# EAGLE board driverMotor (EAGLE 9.6.2)
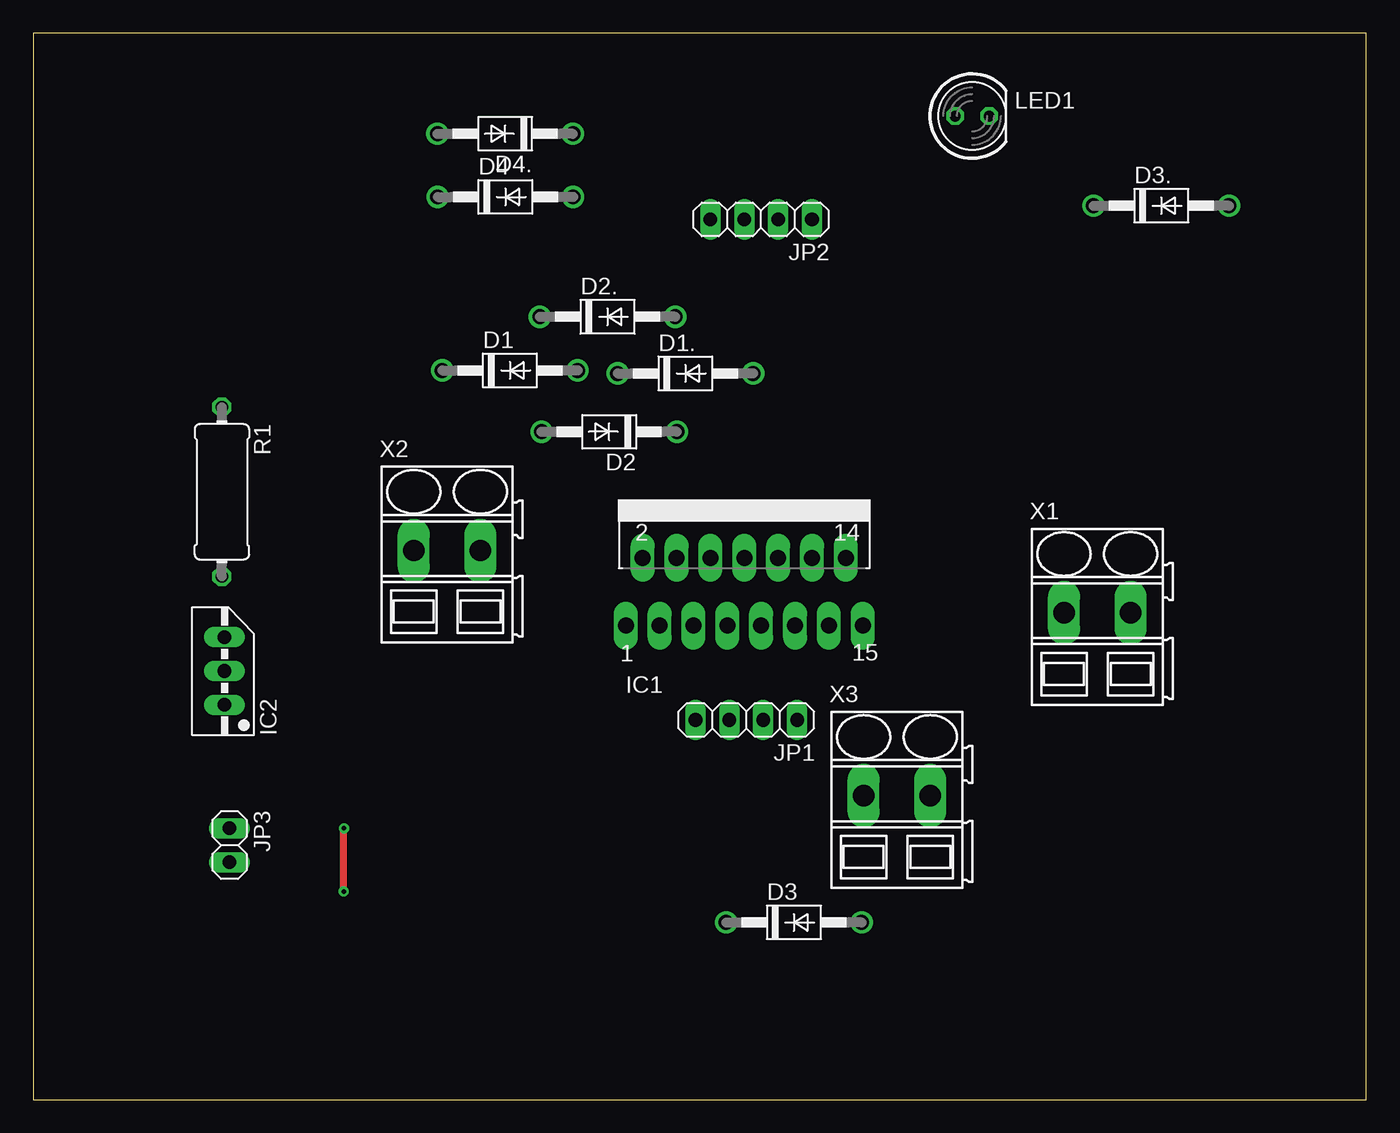
[diagram p0: board, top side]
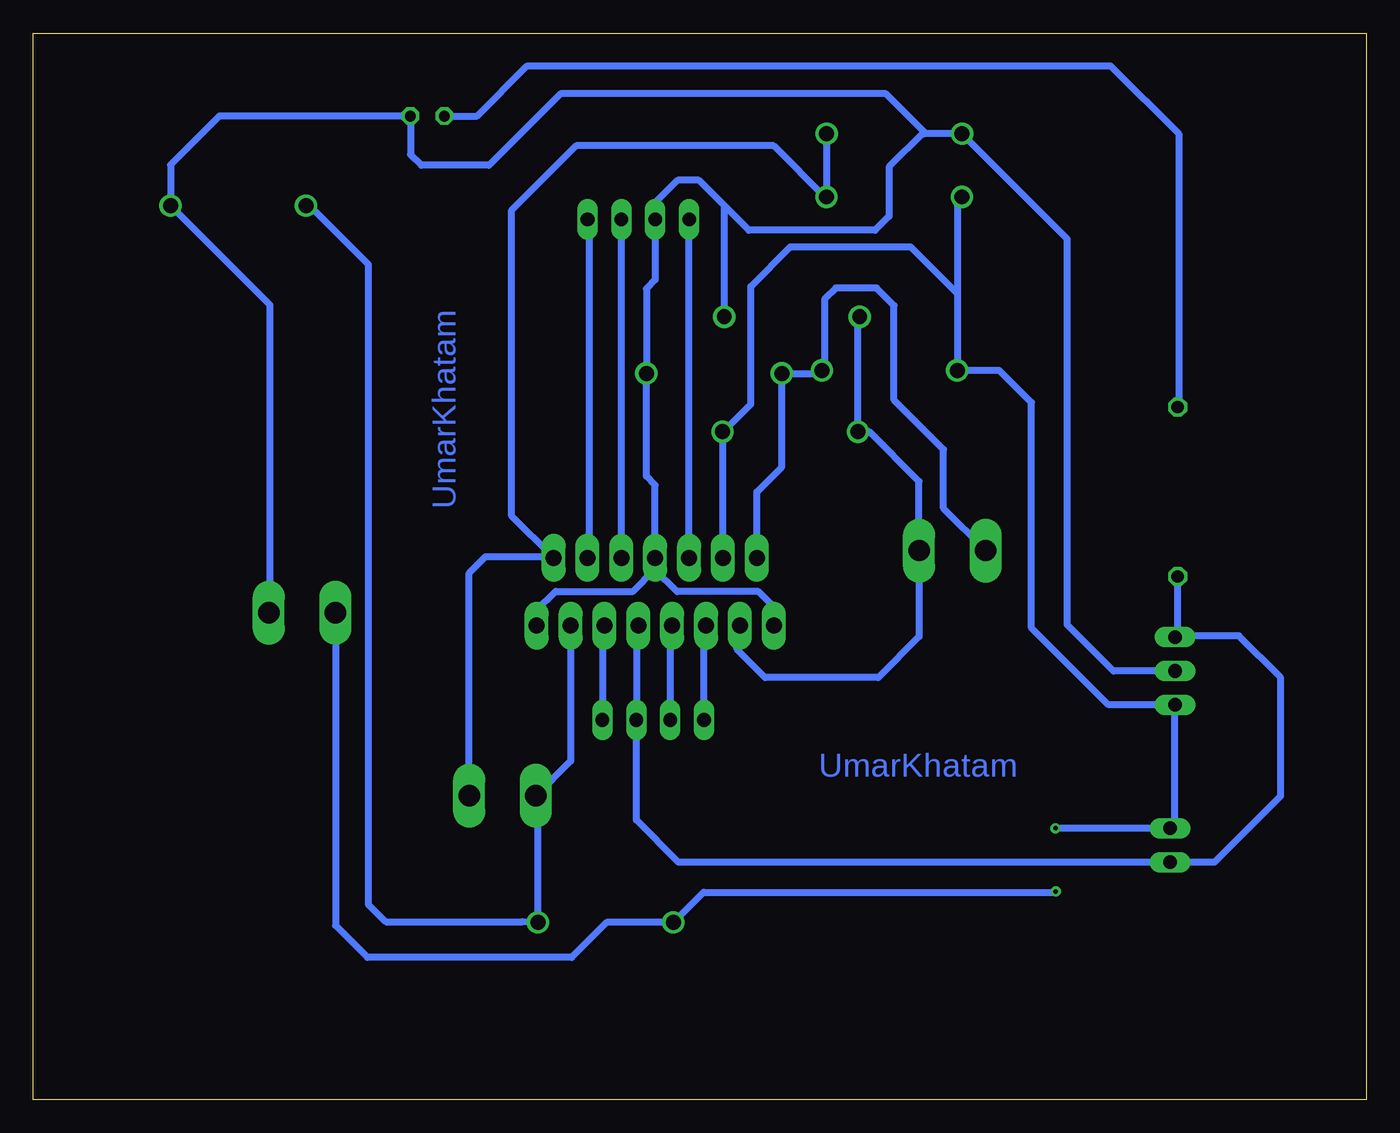
[diagram p1: board, bottom side, seen from below]

Size 100 x 80 mm. Coordinates in mm from the lower left corner, seen from the top.
Outline: 0,0 100,0 100,80 0,80 0,0
Copper layers (1*16): Top 0.035mm / dielectric 1.5mm / Bottom 0.035mm
Design rules "default": minimum track width 6mil, minimum drill 0.35mm, track to track 6mil, track to pad 6mil, pad to pad 6mil, via to via 6mil, smd to smd 6mil, copper to edge 40mil, drill to drill 6mil, minimum pad ring 10mil, minimum via ring 8mil, stop-mask expansion 4mil, vias tented up to drill 0mil, thermal gap 10mil

## Footprints (pad centres in the part's own frame; a part is rotated, then mirrored left to right if it is on the bottom)
DO41-10 = drill 1.118: A 5.08,0; C -5.08,0
MULTIWATT-15 = drill 1.2 long: 1 -8.89,-7.62; 2 -7.62,-2.54; 3 -6.35,-7.62; 4 -5.08,-2.54; 5 -3.81,-7.62; 6 -2.54,-2.54; 7 -1.27,-7.62; 8 0,-2.54; 9 1.27,-7.62; 10 2.54,-2.54; 11 3.81,-7.62; 12 5.08,-2.54; 13 6.35,-7.62; 14 7.62,-2.54; 15 8.89,-7.62
78MXXS = drill 1.016 long: GND 0,-2.54; IN -2.54,-2.54; OUT 2.54,-2.54
1X04 = drill 1.016 long: 1 -3.81,0; 2 -1.27,0; 3 1.27,0; 4 3.81,0
1X02 = drill 1.016 long: 1 -1.27,0; 2 1.27,0
LED5MM = drill 0.813 octagon: A -1.27,0; K 1.27,0
0411/12 = drill 0.914 octagon: 1 -6.35,0; 2 6.35,0
SMKDSP_1,5/2 = drill 1.6 pad 1.8 long: 1 -2.5,0; 2 2.5,0

## Placement (x,y rotation side)
D1  1N4004  [DO41-10]  35.75,54.7 0 top
D1.  1N4004  [DO41-10]  48.92,54.48 0 top
D2  1N4004  [DO41-10]  43.21,50.1 180 top
D2.  1N4004  [DO41-10]  43.08,58.73 0 top
D3  1N4004  [DO41-10]  57.06,13.29 0 top
D3.  1N4004  [DO41-10]  84.63,67.07 0 top
D4  1N4004  [DO41-10]  35.42,67.72 0 top
D4.  1N4004  [DO41-10]  35.4,72.47 180 top
IC1  L298  [MULTIWATT-15]  53.34,43.18 0 top
IC2  [78MXXS]  11.81,32.16 90 top
JP1  [1X04]  53.49,28.48 180 top
JP2  [1X04]  54.61,66.04 180 top
JP3  [1X02]  14.72,19.08 270 top
LED1  [LED5MM]  70.44,73.79 0 top
R1  [0411/12]  14.15,45.6 270 top
X1  SMKDSP_1,5/2  [SMKDSP_1,5/2]  79.83,36.52 0 top
X2  SMKDSP_1,5/2  [SMKDSP_1,5/2]  31.05,41.19 0 top
X3  SMKDSP_1,5/2  [SMKDSP_1,5/2]  64.8,22.79 0 top

## Library data of the parts
D1 D1. D2 D2. D3 D3. D4 D4. = diode
IC1 = st-microelectronics
IC2 = v-reg
JP1-JP3 = pinhead
LED1 = led
R1 = resistor
X1-X3 = con-phoenix-smkdsp; MF: FARNELL; MPN: 1733570; OC_FARNELL: 3041244; OC_NEWARK: 69C8588

## Nets
+5V: IC1.9 IC2.OUT JP1.2 JP3.2 R1.2
ENABLE_A: IC1.6 JP2.4
ENABLE_B: IC1.11 JP1.1
GND: D1..A D2..A D3..A D4..A IC1.1 IC1.8 IC1.15 IC2.GND JP2.3 LED1.K X1.2
INPUT1: IC1.5 JP1.4
INPUT2: IC1.7 JP1.3
INPUT3: IC1.10 JP2.2
INPUT4: IC1.12 JP2.1
LED: LED1.A R1.1
MOTOR1_1: D1..C D1.A IC1.2 X2.1
MOTOR1_2: D2..C D2.A IC1.3 X2.2
MOTOR2_1: D3..C D3.A IC1.13 X3.1
MOTOR2_2: D4..C D4.A IC1.14 X3.2
VS: D1.C D2.C D3.C D4.C IC1.4 IC2.IN JP3.1 X1.1

## Tracks (layer width: path | path; a pad name or v marks a point on that pad's centre or on a via)
+5V
  Bottom 0.508: IC1.9 54.76,35.41 JP1.2 54.76,20.96 51.61,17.81 JP3.2 11.38,17.81 6.42,22.77 6.42,31.66 9.54,34.79 14.25,34.79 | IC2.OUT 14.25,34.79 | 14.25,34.79 14.15,34.9 R1.2
ENABLE_A
  Bottom 0.508: IC1.6 JP2.4
ENABLE_B
  Bottom 0.508: IC1.11 57.3,35.41 JP1.1
GND
  Bottom 0.508: D2..A 48.16,67.06 | 48.16,67.06 50.06,68.97 51.66,68.97 53.34,67.29 JP2.3 53.34,61.5 54,60.84 D1..A 54,46.77 53.34,46.11 IC1.8 53.34,39.8 | X1.2 82.27,36.58 82.27,59.63 D3..A 89.7,70.13 86.05,73.79 LED1.K 71.7,70.91 70.88,70.09 65.81,70.09 60.45,75.46 36.02,75.46 33.17,72.61 33.23,72.55 | IC1.1 44.45,36.96 45.6,38.11 51.7,38.11 53.34,39.74 53.34,39.8 | IC1.15 62.23,36.72 60.82,38.14 55,38.14 53.34,39.8 | 33.23,72.55 33.15,72.47 D4..A | 48.16,67.06 46.32,65.22 36.85,65.22 35.8,66.27 35.8,69.98 33.23,72.55 | 30.17,72.32 D4..A | IC2.GND 18.96,32.16 22.42,35.61 22.42,64.57 D4..A
INPUT1
  Bottom 0.508: JP1.4 49.68,35.41 IC1.5
INPUT2
  Bottom 0.508: IC1.7 52.22,35.41 52.22,31.74 JP1.3
INPUT3
  Bottom 0.508: IC1.10 JP2.2
INPUT4
  Bottom 0.508: JP2.1 58.31,65.93 58.31,40.75 IC1.12
LED
  Bottom 0.508: LED1.A 66.72,73.79 62.95,77.56 19.18,77.56 14.07,72.45 14.07,52.03 R1.1
MOTOR1_1
  Bottom 0.508: IC1.2 45.72,45.59 43.84,47.47 D1..C 41.06,54.48 D1.A | X2.1 31.71,44.36 31.71,48.77 35.43,52.49 35.43,59.59 36.73,60.88 39.8,60.88 40.64,60.04 40.64,54.48
MOTOR1_2
  Bottom 0.508: D2..C 38.13,58.6 D2.A 37.28,50.1 33.55,46.37 X2.2 33.55,34.73 36.61,31.66 45.09,31.66 47.2,33.77 47.2,35.35 IC1.3
MOTOR2_1
  Bottom 0.508: 62.04,22.53 X3.1 | IC1.13 59.69,25.39 X3.1 | X3.1 62.14,22.63 D3.A 63.3,13.34 73.55,13.34 74.86,14.65 74.86,62.67 79.26,67.07 D3..C
MOTOR2_2
  Bottom 0.508: D4..C 40.48,67.74 D4.A 40.62,67.72 44.45,71.55 59.27,71.55 64.15,66.68 64.15,43.83 61.05,40.73 | 61.05,40.73 IC1.14 | X3.2 67.3,39.5 66.07,40.73 61.05,40.73
VS  (via drill 0.35)
  Top 0.508: v23.3,15.61 v23.3,20.34 v23.3,20.35
  Bottom 0.508: IC1.4 48.26,50.08 | 48.26,50.08 D2.C | D4.C 30.68,67.39 30.68,60.46 | 30.68,60.46 D1.C 27.52,54.7 25.12,52.3 25.12,35.4 19.33,29.61 IC2.IN 14.35,20.72 JP3.1 v23.3,20.35 23.35,20.31 | 48.26,50.08 46.17,52.16 46.17,61.01 43.2,63.98 34.19,63.98 30.68,60.46 | X1.1 77.33,13.05 74.93,10.66 59.61,10.66 56.98,13.29 D3.C 49.71,15.56 23.3,15.56 23.3,15.57 v23.3,15.61

## Text on the board
Bottom: UmarKhatam | UmarKhatam